# Altium PCB MotherBoard.PcbDoc
Units mm, origin at the board's own origin, x right, y up, seen from the top; angles counter-clockwise.
Board outline 100.33 x 127 mm, 2 copper layers (Top Layer, Bottom Layer), stack 1.071 mm thick; 23 components, 66 nets, 216 pads, 179 vias.
Unrouted connection lines stored in the file: 222.
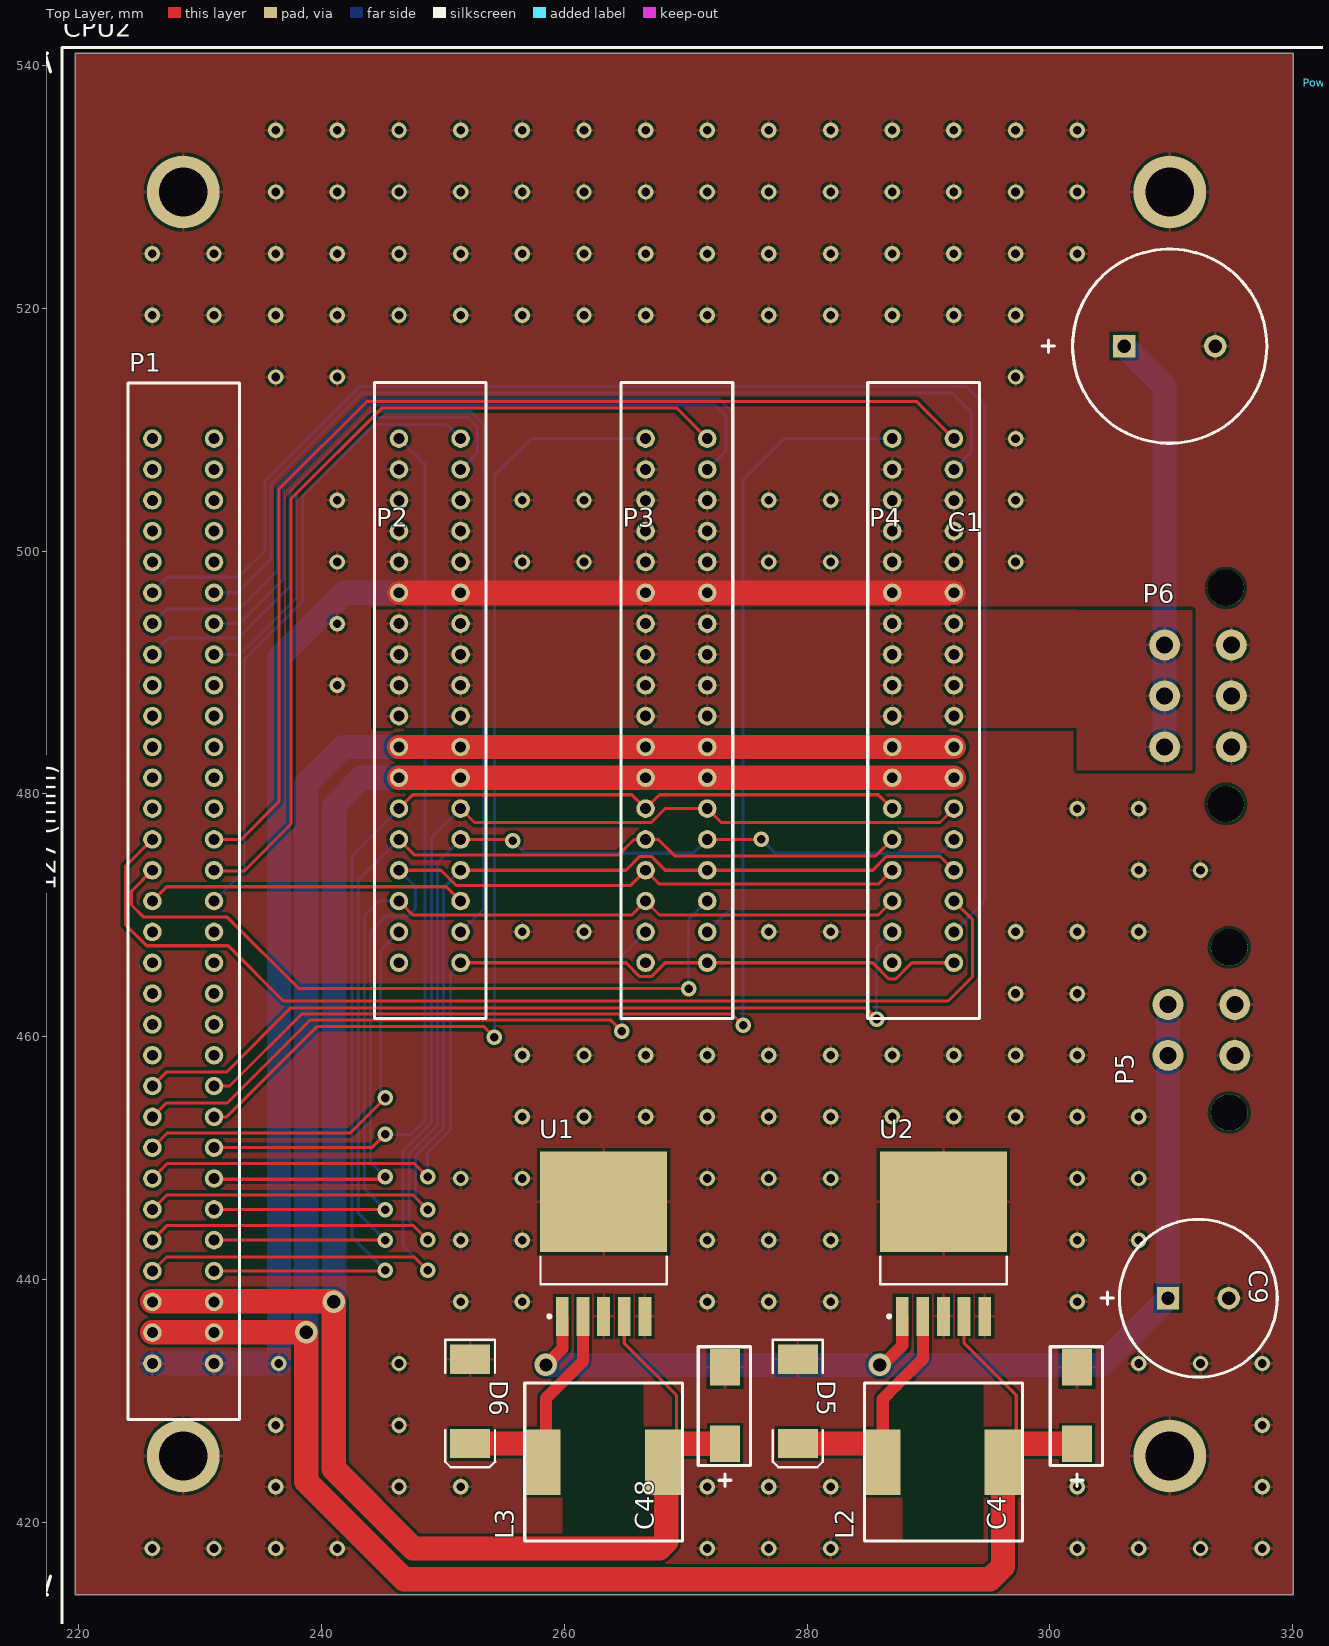
[diagram p0: Top Layer view]
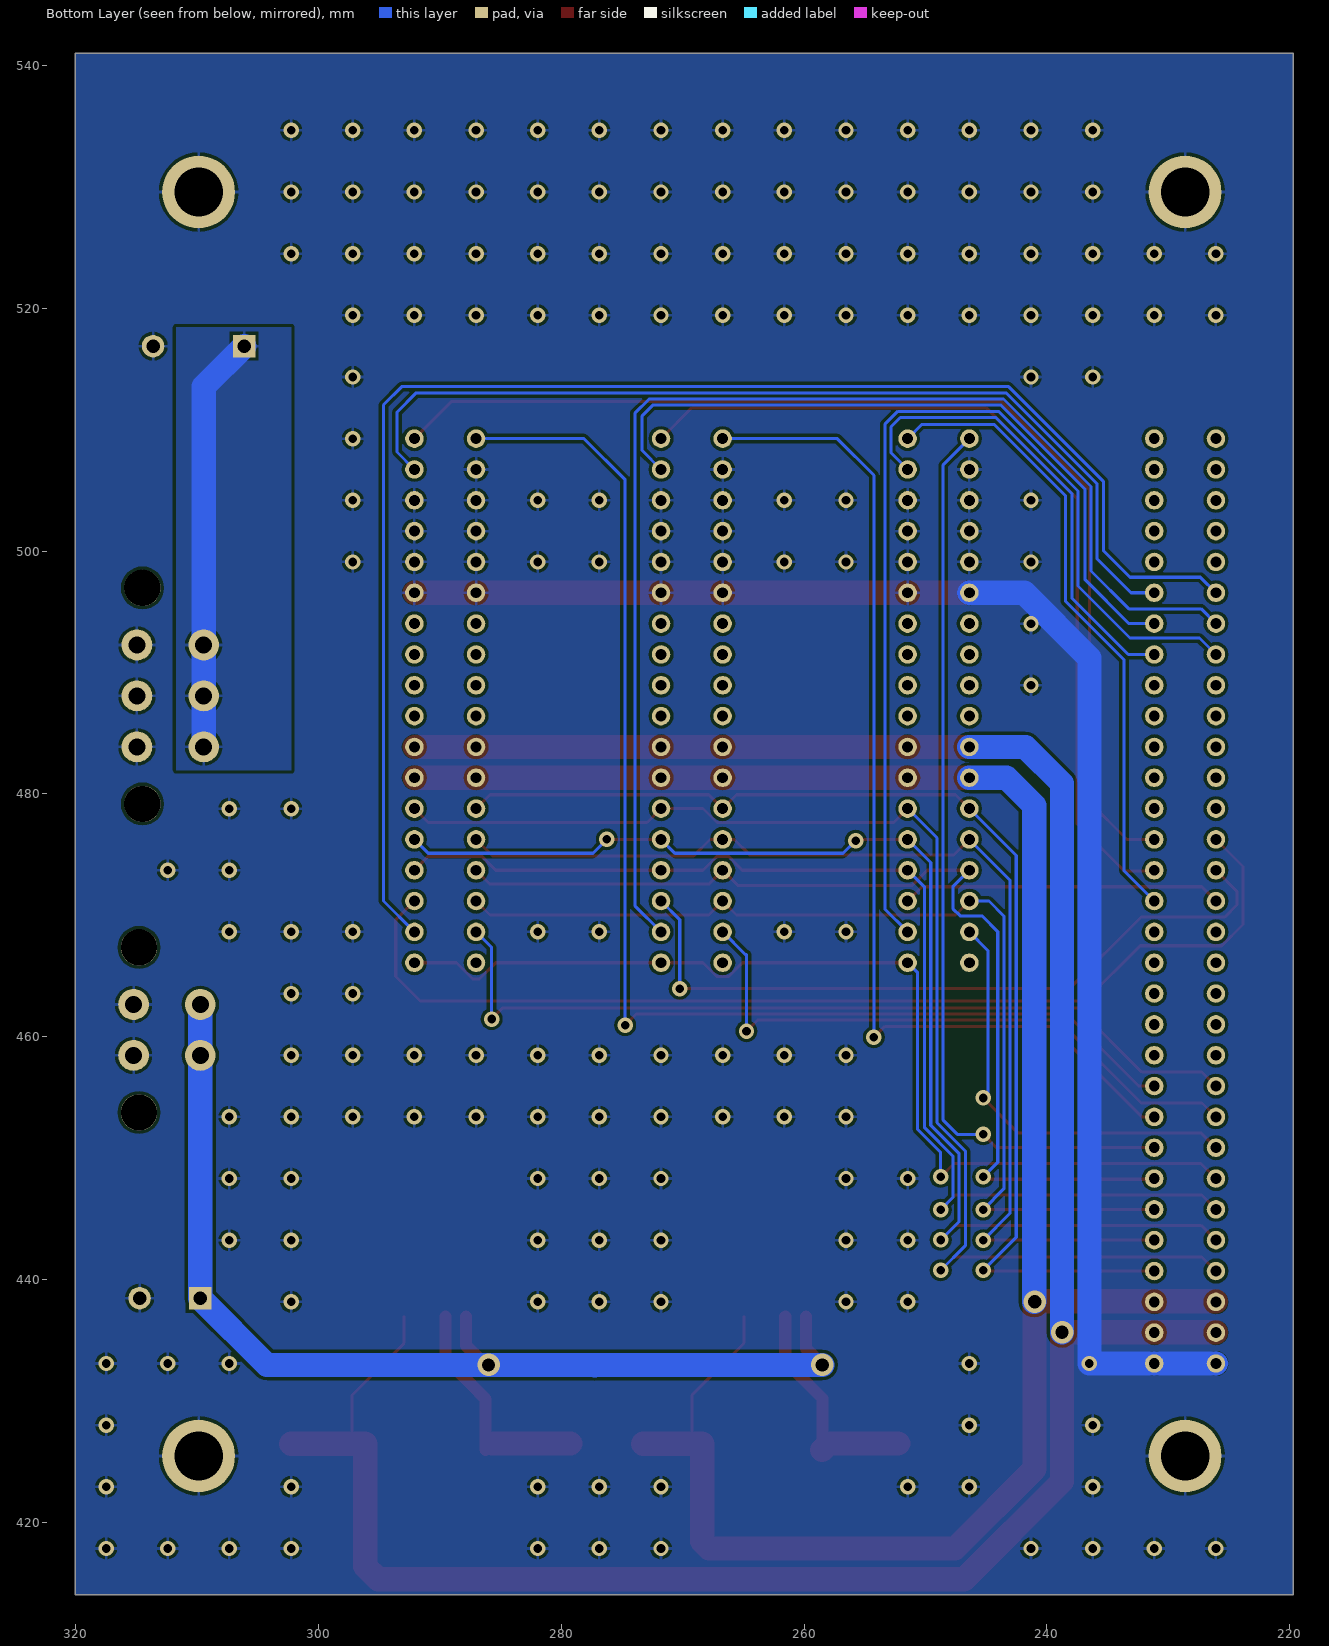
[diagram p1: Bottom Layer view, seen from below]

## Layer stack, top to bottom
Top Layer: signal copper 0.0356
Dielectric: core 1, FR-4, Dk 4.8
Bottom Layer: signal copper 0.0356

## Board outline
219.71,541.02 219.71,414.02 320.04,414.02 320.04,541.02

## Design rules (kind name [scope] priority, off if disabled: settings)
Clearance [All] p1: gap=0.254
Height [All] p1: minheight=0 maxheight=200 prefheight=12.7
PolygonConnect [All] p1: connectstyle=Relief reliefconductorwidth=0.254 reliefentries=4 polygonreliefangle="90 Angle"
RoutingVias [All] p1: holewidth=0.711 width=1.27 viastyle="Through Hole" minholewidth=0.711 minwidth=1.27 maxholewidth=0.711 maxwidth=1.27
SMDNeckDown [All] p1: percent=200.000
SilkscreenOverComponentPads [All] p1: minsilkscreentomaskgap=0.254
SolderMaskExpansion [All] p1: expansion=0.102
Width [All] p1: maxlimit=2 minlimit=0.1 preferedwidth=0.254
26 further rules are at their usual default settings.

## Components (designator, comment, footprint, x,y, rotation, side; value= is the part's Value field where it differs from the comment)
C1 "Cap Pol1" Cap16x36 309.88,516.89 r0 top
C4 "Cap Pol1" "Type E" 302.24,425.95 r90 top
C9 "Cap Pol1" Cap13x25 312.24,438.45 r0 top
C48 "Cap Pol1" "Type E" 273.24,425.95 r90 top
CPU1 "CPU_Unit" CPU_Unit 510.1,294.67 r0 top
CPU2 "CPU_Unit" G2038 442.6,541.5 r270 top
D5 "MBRS340T3G" SMC 279.24,429.95 r270 top
D6 "MBRS340T3G" SMC 252.24,429.95 r270 top
DRV1 "Driver Unit" Driver 517.1,335.67 r0 top
DRV2 "Driver Unit" Driver 524.1,335.67 r0 top
DRV3 "Driver Unit" Driver 531.1,335.67 r0 top
L2 "Inductor" CDRH127/LD 286.24,424.95 r90 top
L3 "Inductor" CDRH127/LD 258.24,424.95 r90 top
P1 "31x2A Slot" SL-62A 231.14,433.07 r90 top locked
P2 "18x2A Slot" SL-36A 251.46,466.09 r90 top locked
P3 "18x2A Slot" SL-36A 271.78,466.09 r90 top locked
P4 "18x2A Slot" SL-36A 292.1,466.09 r90 top locked
P5 "MHDR2X2" MF-2x2 315.24,458.45 r90 top
P6 "MHDR2X3" MF-2x3 314.96,483.87 r90 top
"Power 5V" "Power 5V" ZP-36A 315.7,274.9 r90 top
"Power 24V" "Power 24V" HTC-200-24 323.3,538.6 r270 top
U1 "LM2596S-3.3" TS5B_N 263.24,442.95 r90 top
U2 "LM2596S-5.0" TS5B_N 291.24,442.95 r90 top

## Footprints (in the part's own frame and the unit in brackets; to place one, negate y for a bottom-side part, rotate by r counter-clockwise, add the part's x,y. Pads: shape width x height; smd on the part's side, far side on the other; paste and mask are expansions set on the pad)
Cap13x25 [mm]
  rect 1.85x1.85 hole 1.1: 1(-2.5,0)
  round 1.85 hole 1.1: 2(2.5,0)
  silkscreen extent -8,-6.5 6.5,6.5, body extent -6.47,-6.5 6.47,6.47, height 25
Cap16x36 [mm]
  rect 1.85x1.85 hole 1.1: 1(-3.75,0)
  round 1.85 hole 1.1: 2(3.75,0)
  silkscreen extent -10.5,-8 8,8, body extent -7.97,-7.97 7.97,8, height 36
CDRH127/LD [mm]
  rect 5.4x2.9 smd: 1(0,0)
  rect 5.4x3 smd: 2(0,-9.9)
  Top Layer pour cut-out: -6.5,-1.6 6.5,-1.6 6.5,-8.3 -6.5,-8.3
  silkscreen extent -6.5,-11.5 6.5,1.5, body extent -6.5,-11.5 6.53,1.5, height 8
CPU_Unit [mm]
  body extent 0,0 2.54,128, height 70
Driver [mm]
  body extent 0,0 2.54,86.36, height 70
G2038 [mm]
  silkscreen extent 0,-224 294,0
HTC-200-24 [mm] "Power supply 24V 8.3A 200W"
  body extent 0,0 230,115, height 50
MF-2x2 [mm] "4 pin Mini-Fit Connector"
  round 3 hole 3: 0(-4.7,0.45) 0(8.9,0.45)
  round 2.54 hole 1.4: 1(0,0) 2(4.2,0) 3(4.2,5.5) 4(0,5.5)
  body extent -6.05,-2.7 10.34,7.55, height 12.8
MF-2x3 [mm] "6 pin Mini-Fit Connector"
  round 3 hole 3: 0(-4.7,0.45) 0(13.1,0.45)
  round 2.54 hole 1.4: 1(0,0) 2(4.2,0) 3(8.4,0) 4(8.4,5.5) 5(4.2,5.5) 6(0,5.5)
  body extent -6.05,-2.7 14.48,7.55, height 12.8
SL-36A [mil] "Mother Slot"
  round 60 hole 35.43: 1(0,0) 2(100,0) 3(200,0) 4(300,0) 5(400,0) 6(500,0) 7(600,0) 8(700,0) 9(800,0) 10(900,0) 11(1000,0) 12(1100,0) 13(1200,0) 14(1300,0) 15(1400,0) 16(1500,0) 17(1600,0) 18(1700,0) 19(0,200) 20(100,200) 21(200,200) 22(300,200) 23(400,200) 24(500,200) 25(600,200) 26(700,200) 27(800,200) 28(900,200) 29(1000,200) 30(1100,200) 31(1200,200) 32(1300,200) 33(1400,200) 34(1500,200) 35(1600,200) 36(1700,200)
  silkscreen extent -181,-83 1882,280, body extent -181,-83 1882,280, height 634
SL-62A [mil] "Mother Slot"
  round 60 hole 35.43: 1(0,0) 2(100,0) 3(200,0) 4(300,0) 5(400,0) 6(500,0) 7(600,0) 8(700,0) 9(800,0) 10(900,0) 11(1000,0) 12(1100,0) 13(1200,0) 14(1300,0) 15(1400,0) 16(1500,0) 17(1600,0) 18(1700,0) 19(1800,0) 20(1900,0) 21(2000,0) 22(2100,0) 23(2200,0) 24(2300,0) 25(2400,0) 26(2500,0) 27(2600,0) 28(2700,0) 29(2800,0) 30(2900,0) 31(3000,0) 32(0,200) 33(100,200) 34(200,200) 35(300,200) 36(400,200) 37(500,200) 38(600,200) 39(700,200) 40(800,200) 41(900,200) 42(1000,200) 43(1100,200) 44(1200,200) 45(1300,200) 46(1400,200) 47(1500,200) 48(1600,200) 49(1700,200) 50(1800,200) 51(1900,200) 52(2000,200) 53(2100,200) 54(2200,200) 55(2300,200) 56(2400,200) 57(2500,200) 58(2600,200) 59(2700,200) 60(2800,200) 61(2900,200) 62(3000,200)
  silkscreen extent -181,-83 3181,280, body extent -181,-83 3181,280, height 634
SMC [mm] "DO-214-AB/SMC; 2 C-Bend Leads; Body 7.9 x 5.9 mm, inc. leads (LxW)"
  rect 2.4x3.3 smd: 1(-3.475,0) 2(3.475,0)
  silkscreen extent -5.07,-2.05 5.43,2.05
TS5B_N [mm] "D2-PAK, 6-Leads, Body 8.6x10.2mm, Pitch 1.7mm, Lead Span 14.1mm, IPC Medium Density"
  rect 3.2x1.05 smd: 1(-6,3.4) 2(-6,1.7) 3(-6,0) 4(-6,-1.7) 5(-6,-3.4)
  rect 8.3x10.45 smd: 6(3.45,0)
  silkscreen extent -6.12,-5.2 -1.1,5.2, body extent -3.35,-5.2 6.05,5.2, height 4.65
"Type E" [mm] "Tantal capacitor"
  rect 3x2.5 smd: 1(0.5,0) 2(6.8,0)
  silkscreen extent -3,-2.1 8.5,2.2, body extent 0,-2.15 7.3,2.15, height 4
ZP-36A [mm] "Power supply 5V 5A"
  body extent 0,0 110,80, height 37

## Part data
C1 C4 C9 C48: "Polarized Capacitor (Radial)"
D5 D6: library part 30BQ100, "Schottky Rectifier"
P1: "31x2 Slot"
P5: "Header, 2-Pin, Dual row"
P6: "Header, 3-Pin, Dual row"
U1 U2: "SIMPLE SWITCHER Power Converter 150 KHz 3A Step-Down Voltage Regulator"

## Free pads (board coordinates)
  round 6 hole 4: 0(228.6,425.45) 0(228.6,529.59) 0(309.88,425.45) 0(309.88,529.59)

## Via types
v1: diameter 1.27, hole 0.711, Top Layer to Bottom Layer, 175 vias
v2: diameter 1.85, hole 1.1, Top Layer to Bottom Layer, 4 vias

## Nets (pads, with @x,y where several pads share a name; then routed paths per layer and width w, separated by ;. In a path a pad name is that pad's centre, name@x,y a point inside that pad or via, vN(x,y) a via of type N, cw(c..) or ccw(c..) an arc to the next point about the centre after c; other vN are vias at no path point)
+3.3V: C48.1 L3.2 P1.3 P1.34 P2.7 P2.25 P3.7 P3.25 P4.7 P4.25 U1.4 | length 177.9
  Top Layer w0.254: U1.4 264.94,434.75 269.24,430.45 269.24,426.8 L3.2@268.39,425.95
  Top Layer w2: P1.34@226.06,438.19 v2@240.94,438.19 ; v2(241,438.15) 241,424.39 247.56,417.83 267.82,417.83 268.39,418.4 268.39,426.45 C48.1 ; P2.25 P2.25 P4.7 P4.7
  Bottom Layer w2: v2@241.04,438.15 241.04,479.05 243.32,481.33 P2.25
+5V: C4.1 L2.2 P1.2 P1.33 P2.8 P2.26 P3.8 P3.26 P4.8 P4.26 U2.4 | length 215.4
  Top Layer w0.254: U2.4 292.94,434.75 297.24,430.45 297.24,427.05 L2.2@296.14,425.95
  Top Layer w2: P1.33@226.06,435.65 v2(238.74,435.65) 238.74,423.35 246.8,415.29 295.08,415.29 296.14,416.35 296.14,426.45 C4.1 ; P2.26 P4.8
  Bottom Layer w2: v2(238.74,435.65) 238.74,480.85 241.76,483.87 P2.26
+30: C1.1 P2.9 P2.10 P2.11 P2.12 P2.27 P2.28 P2.29 P2.30 P3.9 P3.10 P3.11 P3.12 P3.27 P3.28 P3.29 P3.30 P4.9 P4.10 P4.11 P4.12 P4.27 P4.28 P4.29 P4.30 P6.4 P6.5 P6.6 | length 34.4
  Bottom Layer w2: C1.1 309.46,513.56 P6.4 P6.5 P6.6
DRV_DIR_A: P1.39 P2.20 | length 35.4
  Top Layer w0.254: P1.39 227.26,452.05 242.34,452.05 v1(245.24,454.95)
  Bottom Layer w0.254: v1(245.24,454.95) 244.84,455.35 244.84,467.09 P2.20
DRV_DIR_B: P1.40 P3.20 | length 51.3
  Top Layer w0.254: P1.40 227.203,454.533 232.223,454.533 239.048,461.358 263.832,461.358 v1(264.74,460.45)
  Bottom Layer w0.254: v1(264.74,460.45) 264.74,466.77 ; 264.84,466.77 P3.20
DRV_DIR_C: P1.41 P4.20 | length 70.4
  Top Layer w0.254: P1.41 227.203,457.073 232.163,457.073 237.464,462.374 284.824,462.374 v1@285.744,461.454
  Bottom Layer w0.254: v1(285.74,461.45) 285.74,467.35 P4.20
DRV_DIR_D: P1.42
DRV_DIR_E: P1.43
DRV_DIR_F: P1.44
DRV_DIR_G: P1.45
DRV_DIR_H: P1.46
DRV_ENA_A: P1.47 P2.3 | length 26.4
  Top Layer w0.254: P1.47 227.24,472.35 250.28,472.35 P2.3
DRV_ENA_B: P1.48 P3.3 | length 60.2
  Top Layer w0.254: P1.48 224.34,471.99 224.34,470.85 225.34,469.85 232.24,469.85 238.14,463.95 v1(270.24,463.95)
  Bottom Layer w0.254: v1(270.24,463.95) 270.24,469.63 P3.3
DRV_ENA_C: P1.49 P4.3 | length 88
  Top Layer w0.254: P1.49 223.832,474.022 223.832,469.242 225.587,467.487 232.303,467.487 236.856,462.934 291.624,462.934 293.64,464.95 293.64,469.63 P4.3
DRV_ENA_D: P1.50
DRV_ENA_E: P1.51
DRV_ENA_F: P1.52
DRV_ENA_G: P1.53
DRV_ENA_H: P1.54
DRV_MS1: P1.7 P2.22 P3.22 P4.22 | length 85.7
  Top Layer w0.254: P1.7 231.2,448.25 232.34,448.25 v1@245.24,448.25 ; P2.22 249.844,473.71 251.114,472.44 265.43,472.44 P3.22 267.843,472.567 285.877,472.567 P4.22
  Bottom Layer w0.254: v1(245.24,448.45) 244.04,449.65 244.04,468.65 245.34,469.95 247.14,469.95 247.74,470.55 247.74,472.35 P2.22
DRV_MS2: P1.6 P2.21 P3.21 P4.21 | length 84.9
  Top Layer w0.254: P1.6@231.14,445.75 v1(245.24,445.75) ; P2.21 247.523,470.027 265.557,470.027 P3.21 267.843,470.027 285.877,470.027 P4.21
  Bottom Layer w0.254: v1(245.24,445.75) 243.532,447.458 243.532,469.942 244.76,471.17 P2.21
DRV_RESET: P1.38 P2.1 P3.1 P4.1 | length 85.1
  Top Layer w0.254: P1.38 227.3,449.55 247.64,449.55 v1(248.74,448.45) ; P2.1 265.084,466.09 266.227,464.947 267.173,464.947 268.316,466.09 P3.1 285.404,466.09 286.744,464.75 287.296,464.75 288.636,466.09 P4.1
  Bottom Layer w0.254: v1(248.74,448.45) 248.74,450.45 250.64,452.35 250.64,465.27 P2.1
DRV_SLEEP: P1.37 P2.4 P3.4 P4.4 | length 96.1
  Top Layer w0.254: P1.37 227.24,446.95 247.54,446.95 v1(248.74,445.75) ; P2.4 265.084,473.71 266.227,474.853 267.173,474.853 268.316,473.71 P3.4 285.404,473.71 286.547,474.853 290.957,474.853 P4.4
  Bottom Layer w0.254: v1@248.7,445.79 247.724,446.766 247.724,450.152 250.064,452.492 250.064,472.314 P2.4
DRV_STEP_A: P1.55 P2.2 | length 83.2
  Bottom Layer w0.254: P1.55 227.42,492.85 233.14,492.85 237.424,497.134 237.424,504.96 243.982,511.518 252.272,511.518 253.34,510.45 253.34,470.51 P2.2
DRV_STEP_B: P1.56 P3.2 | length 103.7
  Bottom Layer w0.254: P1.56 227.28,495.25 233.24,495.25 236.356,498.366 236.356,505.329 243.561,512.534 272.756,512.534 273.94,511.35 273.94,470.79 P3.2
DRV_STEP_C: P1.57 P4.2 | length 124
  Bottom Layer w0.254: P1.57 227.34,497.85 233.14,497.85 235.34,500.05 235.34,505.75 243.14,513.55 293.14,513.55 294.64,512.05 294.64,471.17 P4.2
DRV_STEP_D: P1.58
DRV_STEP_E: P1.59
DRV_STEP_F: P1.60
DRV_STEP_G: P1.61
DRV_STEP_H: P1.62
GND: C1.2 C4.2 C9.2 C48.2 D5.1 D6.1 P1.1 P1.32 P2.13 P2.14 P2.15 P2.16 P2.31 P2.32 P2.33 P2.34 P2.35 P3.13 P3.14 P3.15 P3.16 P3.31 P3.32 P3.33 P3.34 P3.35 P4.13 P4.14 P4.15 P4.16 P4.31 P4.32 P4.33 P4.34 P4.35 P5.1 P5.2 P6.1 P6.2 P6.3 pad.0 U1.3 U1.5 U1.6 U2.3 U2.5 U2.6 | length 126.4
  Top Layer w2: P2.31 P4.13
  Bottom Layer w2: P1.32 P1.1 v1(236.486,433.07) 236.486,491.196 241.86,496.57 P2.31
  other v1: 226.06,417.83 231.14,417.83 236.22,417.83 241.3,417.83 271.78,417.83 276.86,417.83 281.94,417.83 302.26,417.83 307.34,417.83 312.42,417.83 317.5,417.83 236.22,422.91 246.38,422.91 251.46,422.91 271.78,422.91 276.86,422.91 281.94,422.91 302.26,422.91 317.5,422.91 236.22,427.99 246.38,427.99 317.5,427.99 246.38,433.07 307.34,433.07 312.42,433.07 317.5,433.07 251.46,438.15 256.54,438.15 271.78,438.15 276.86,438.15 281.94,438.15 302.26,438.15 251.46,443.23 256.54,443.23 271.78,443.23 276.86,443.23 281.94,443.23 302.26,443.23 307.34,443.23 251.46,448.31 256.54,448.31 271.78,448.31 276.86,448.31 281.94,448.31 302.26,448.31 307.34,448.31 256.54,453.39 261.62,453.39 266.7,453.39 271.78,453.39 276.86,453.39 281.94,453.39 287.02,453.39 292.1,453.39 297.18,453.39 302.26,453.39 307.34,453.39 256.54,458.47 261.62,458.47 266.7,458.47 271.78,458.47 276.86,458.47 281.94,458.47 287.02,458.47 292.1,458.47 297.18,458.47 302.26,458.47 297.18,463.55 302.26,463.55 256.54,468.63 261.62,468.63 276.86,468.63 281.94,468.63 297.18,468.63 302.26,468.63 307.34,468.63 307.34,473.71 312.42,473.71 302.26,478.79 307.34,478.79 241.3,488.95 241.3,494.03 241.3,499.11 256.54,499.11 261.62,499.11 276.86,499.11 281.94,499.11 297.18,499.11 241.3,504.19 256.54,504.19 261.62,504.19 276.86,504.19 281.94,504.19 297.18,504.19 297.18,509.27 236.22,514.35 241.3,514.35 297.18,514.35 226.06,519.43 231.14,519.43 236.22,519.43 241.3,519.43 246.38,519.43 251.46,519.43 256.54,519.43 261.62,519.43 266.7,519.43 271.78,519.43 276.86,519.43 281.94,519.43 287.02,519.43 292.1,519.43 297.18,519.43 226.06,524.51 231.14,524.51 236.22,524.51 241.3,524.51 246.38,524.51 251.46,524.51 256.54,524.51 261.62,524.51 266.7,524.51 271.78,524.51 276.86,524.51 281.94,524.51 287.02,524.51 292.1,524.51 297.18,524.51 302.26,524.51 236.22,529.59 241.3,529.59 246.38,529.59 251.46,529.59 256.54,529.59 261.62,529.59 266.7,529.59 271.78,529.59 276.86,529.59 281.94,529.59 287.02,529.59 292.1,529.59 297.18,529.59 302.26,529.59 236.22,534.67 241.3,534.67 246.38,534.67 251.46,534.67 256.54,534.67 261.62,534.67 266.7,534.67 271.78,534.67 276.86,534.67 281.94,534.67 287.02,534.67 292.1,534.67 297.18,534.67 302.26,534.67
NetC9_1: C9.1 P5.3 P5.4 U1.1 U2.1 | length 87.3
  Top Layer w1: v2(258.49,432.95) 259.84,434.3 U1.1 ; v2(285.99,432.95) 286.24,432.95 287.84,434.55 U2.1
  Bottom Layer w2: v2(258.49,432.95) 277.19,432.95 ; 277.24,432.9 277.19,432.95 ; P5.3 P5.4 C9.1 304.24,432.95 v2(285.99,432.95) 277.19,432.95
NetD5_2: D5.2 L2.1 U2.2 | length 19.6
  Top Layer w1: L2.1@285.715,426.475 286.24,425.95 286.24,430.15 287.361,431.271 289.54,433.45 U2.2
  Top Layer w2: D5.2 L2.1@285.715,426.475
NetD6_2: D6.2 L3.1 U1.2 | length 18.7
  Top Layer w1: L3.1@258.49,425.95 258.49,430.2 261.54,433.25 U1.2
  Top Layer w2: D6.2 257.965,426.475 L3.1@258.49,425.95
NetP2_19: P2.19
NetP3_19: P3.19
NetP4_19: P4.19
NULL_A: P1.8 P2.36 | length 75.4
  Top Layer w0.254: P1.8 244.14,450.85 v1(245.24,451.95)
  Bottom Layer w0.254: v1(245.24,451.95) 247.366,451.95 248.54,453.124 248.54,507.11 P2.36
NULL_B: P1.9 P3.36 | length 86.6
  Top Layer w0.254: P1.9 232.18,453.39 239.64,460.85 253.34,460.85 v1(254.24,459.95)
  Bottom Layer w0.254: v1(254.24,459.95) 254.24,506.25 257.26,509.27 P3.36
NULL_C: P1.10 P4.36 | length 105.1
  Top Layer w0.254: P1.10 232.42,455.93 238.356,461.866 273.824,461.866 v1(274.74,460.95)
  Bottom Layer w0.254: v1(274.74,460.95) 274.74,505.89 278.12,509.27 P4.36
NULL_D: P1.11
NULL_E: P1.12
NULL_F: P1.13
NULL_G: P1.14
NULL_H: P1.15
POS_A: P1.24 P2.17 | length 39.2
  Bottom Layer w0.254: P1.24 233.28,491.49 237.932,496.142 237.932,504.75 244.192,511.01 252.062,511.01 252.832,510.24 252.832,508.102 P2.17
POS_B: P1.25 P3.17 | length 59.4
  Bottom Layer w0.254: P1.25 233.22,494.03 236.864,497.674 236.864,505.119 243.771,512.026 272.464,512.026 273.34,511.15 273.34,508.29 P3.17
POS_C: P1.26 P4.17 | length 78.8
  Bottom Layer w0.254: P1.26 233.06,496.57 235.848,499.358 235.848,505.54 243.35,513.042 291.948,513.042 293.54,511.45 293.54,508.17 P4.17
POS_D: P1.27
POS_D_A: P1.16 P2.18 | length 52.4
  Bottom Layer w0.254: P1.16 233.64,473.67 233.64,491.05 238.44,495.85 238.44,504.539 244.351,510.45 250.28,510.45 P2.18
POS_D_B: P1.17 P3.18 | length 73.2
  Top Layer w0.254: P1.17 231.2,473.65 233.62,473.65 237.49,477.52 237.49,504.308 244.992,511.81 269.24,511.81 P3.18
POS_D_C: P1.18 P4.18 | length 92.2
  Top Layer w0.254: P1.18 233.386,476.25 236.486,479.35 236.486,505.096 243.708,512.318 289.052,512.318 P4.18
POS_D_D: P1.19
POS_D_E: P1.20
POS_D_F: P1.21
POS_D_G: P1.22
POS_D_H: P1.23
POS_E: P1.28
POS_F: P1.29
POS_G: P1.30
POS_H: P1.31
SPI_SCK: P1.35 P2.6 P3.6 P4.6 | length 107.1
  Top Layer w0.254: P1.35 227.22,441.85 247.64,441.85 v1@248.761,440.729 ; P2.6 252.603,477.647 266.227,477.647 267.173,477.647 268.316,478.79 P3.6 272.923,477.647 290.957,477.647 P4.6
  Bottom Layer w0.254: v1@248.761,440.729 246.708,442.782 246.708,450.573 249.048,452.913 249.048,476.378 P2.6
  other v1: 248.74,440.75
SPI_SDI: P1.5 P2.23 P3.23 P4.23 | length 92.3
  Top Layer w0.254: P1.5 v1(245.24,443.23) ; P2.23 247.68,474.95 264.44,474.95 265.74,476.25 267.74,476.25 269.09,474.9 285.67,474.9 P4.23
  Bottom Layer w0.254: v1(245.24,443.23) 243.024,445.446 243.024,472.894 P2.23
SPI_SDO: P1.36 P2.5 P3.5 P4.5 | length 101.9
  Top Layer w0.254: P1.36 227.28,444.45 247.54,444.45 v1(248.74,443.25) ; P2.5 v1@256.04,476.25 ; P3.5 v1(276.24,476.25)
  Bottom Layer w0.254: v1(248.74,443.25) 247.216,444.774 247.216,450.363 249.556,452.703 249.556,474.346 P2.5 ; v1(255.74,476.15) 256.783,475.107 270.637,475.107 P3.5 ; v1(276.24,476.25) 277.383,475.107 290.957,475.107 P4.5
SPI_SEL: P1.4 P2.24 P3.24 P4.24 | length 97.4
  Top Layer w0.254: P1.4 v1@245.24,440.69 ; P2.24 247.523,479.933 265.557,479.933 P3.24 267.843,479.933 285.877,479.933 P4.24
  Bottom Layer w0.254: v1(245.24,440.75) 242.516,443.474 242.516,474.926 P2.24
pads on no net: P5.0 P6.0

## Polygon pours and split planes (outlines as drawn)
+30 on Bottom Layer "Bottom Layer-No Net" (solid, remove dead copper, pour order 1000): 311.74,481.95 302.24,481.95 302.24,518.45 311.74,518.45
GND on Bottom Layer "Top Layer-No Net" (solid, remove dead copper, pour order 1000): 320.04,541.02 219.71,541.02 219.71,414.02 320.04,414.02
GND on Top Layer "Bottom Layer-No Net" (solid, remove dead copper, pour order 1001): 244.36,505.45 244.36,495.45 318.77,495.45 318.77,505.45
GND on Top Layer "Top Layer-No Net" (solid, remove dead copper, pour order 1001): 219.71,541.02 219.71,414.02 320.04,414.02 320.04,541.02
+30 on Top Layer "Bottom Layer-No Net" (solid, remove dead copper, pour order 1000): 244.36,495.45 244.36,485.45 302.24,485.45 302.24,495.45
+30 on Top Layer "Top Layer-No Net" (solid, remove dead copper, pour order 1000): 311.24,481.95 302.24,481.95 302.24,495.191 302.281,495.15 311.74,495.15 311.74,481.95

## Silkscreen, mask and mechanical layers (free items; w line width, h text height)
Top Overlay:
  lines w0.254: 214.122,510.794 214.63,509.27 ; 214.122,539.496 214.63,541.02 ; 214.376,509.27 214.884,509.27 ; 214.376,541.02 214.884,541.02 ; 214.63,518.01 214.63,509.27 ; 214.63,532.28 214.63,541.02 ; 215.138,510.794 214.63,509.27 ; 215.138,539.496 214.63,541.02 ; 216.662,415.544 217.17,414.02 ; 216.662,539.496 217.17,541.02 ; 216.916,414.02 217.424,414.02 ; 216.916,541.02 217.424,541.02 ; 217.17,471.781 217.17,414.02 ; 217.17,483.259 217.17,541.02 ; 217.678,415.544 217.17,414.02 ; 217.678,539.496 217.17,541.02 ; 219.71,409.956 219.71,410.464 ; 221.234,409.702 219.71,410.21 ; 221.234,410.718 219.71,410.21 ; 261.978,410.21 219.71,410.21 ; 277.772,410.21 320.04,410.21 ; 318.516,409.702 320.04,410.21 ; 318.516,410.718 320.04,410.21 ; 320.04,409.956 320.04,410.464
  text "31.75 (mm)" at 215.544,518.264 h1.52 r90
  text "127 (mm)" at 218.084,472.035 h1.52 r90
  text "100.33 (mm)" at 262.232,409.296 h1.52